# Altium PCB Copy of WoodStoveLayout2.PcbDoc (part 2 of 4)
Units mil, origin at the board's own origin, x right, y up, seen from the top; angles counter-clockwise.
Board outline 4000 x 3000 mil, 4 copper layers (Top Layer, L2, L3, Bottom Layer), stack 64.6 mil thick; 132 components, 92 nets, 551 pads, 53 vias.
Unrouted connection lines stored in the file: 211.
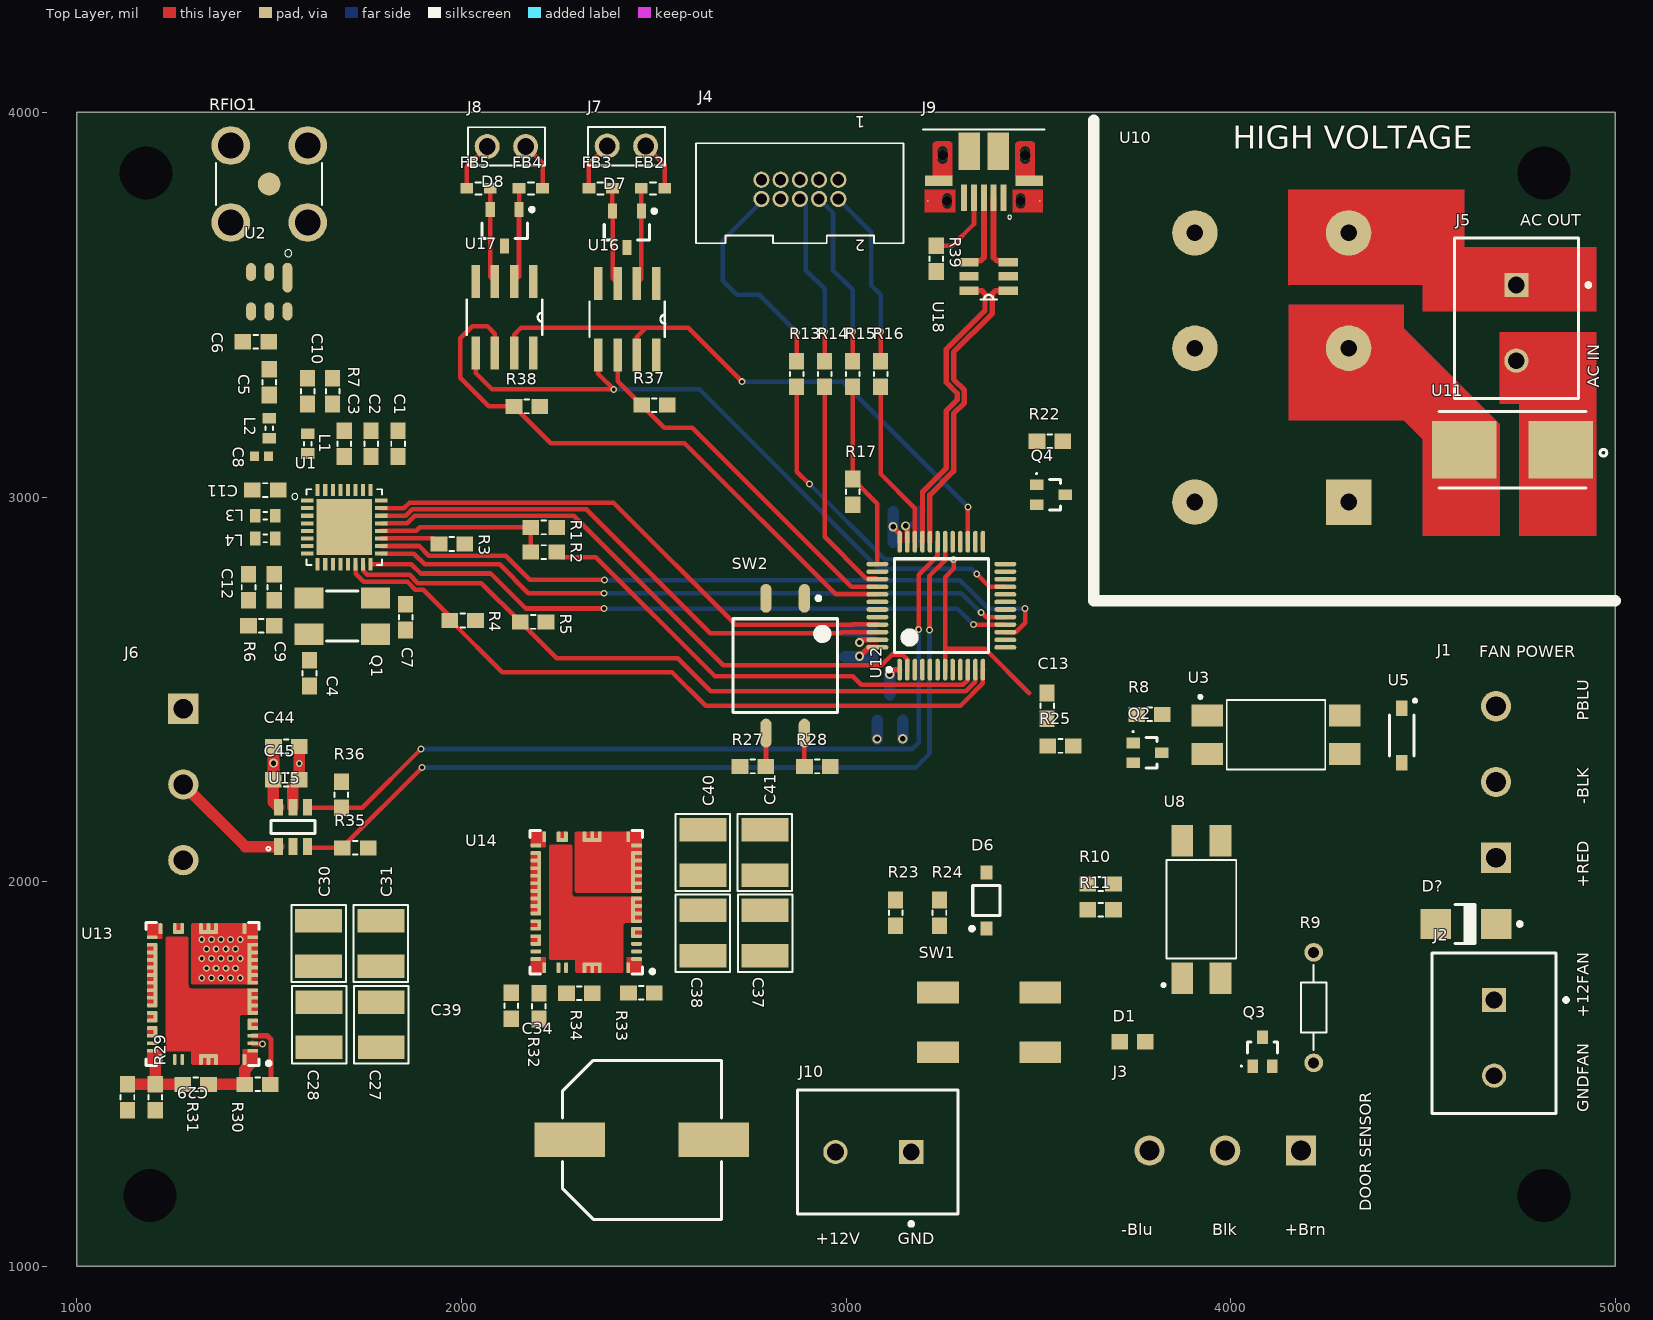
[diagram p0: Top Layer view]

## Part data (continued)
C12 C44: Capacitance=10nF, Case/Package=0603, Case Code (Metric)=1608, Dielectric=X7R, Dielectric Material=Ceramic, Insulation Resistance=10GR, Manufacturer=Murata, Manufacturer Part Number=GRM188R71H103KA01D, Max Operating Temperature=125°C, Min Operating Temperature=-55°C, Package Quantity=1, Supplier Part Number 1=490-1512-1-ND, Tolerance=10%, Voltage=50V, Case Code (Imperial)=0603, ComponentLink1Description=https://datasheet.ciiva.com/129/product-129872.pdf, ComponentLink1URL=https://datasheet.ciiva.com/129/product-129872.pdf, ComponentLink2Description=https://datasheet.ciiva.com/11786/0900766b8003061f-11786516.pdf, ComponentLink2URL=https://datasheet.ciiva.com/11786/0900766b8003061f-11786516.pdf, ComponentLink3Description=https://datasheet.ciiva.com/7937/4360-7937654.pdf, ComponentLink3URL=https://datasheet.ciiva.com/7937/4360-7937654.pdf, ComponentLink4Description=https://datasheet.ciiva.com/7937/1747461-7937655.pdf, ComponentLink4URL=https://datasheet.ciiva.com/7937/1747461-7937655.pdf, ComponentLink5Description=https://datasheet.ciiva.com/7937/1747461-7937656.pdf, ComponentLink5URL=https://datasheet.ciiva.com/7937/1747461-7937656.pdf, ComponentLink6Description=https://datasheet.ciiva.com/28534/1769893-28534235.pdf, ComponentLink6URL=https://datasheet.ciiva.com/28534/1769893-28534235.pdf, ComponentLink7Description=https://datasheet.ciiva.com/129/partnumbering-e-01-129870.pdf, ComponentLink7URL=https://datasheet.ciiva.com/129/partnumbering-e-01-129870.pdf, ComponentLink8Description=https://datasheet.ciiva.com/48428/nmgrm-data-en-48428590.pdf, ComponentLink8URL=https://datasheet.ciiva.com/48428/nmgrm-data-en-48428590.pdf, ComponentLink9Description=https://datasheet.ciiva.com/129/partnumbering-e-01-129871.pdf, ComponentLink9URL=https://datasheet.ciiva.com/129/partnumbering-e-01-129871.pdf, ComponentLink10Description=https://datasheet.ciiva.com/48428/nmgrm-data-en-48428591.pdf, ComponentLink10URL=https://datasheet.ciiva.com/48428/nmgrm-data-en-48428591.pdf, ComponentLink11Description=https://datasheet.ciiva.com/29202/451715-da-01-en-vs-kondensator-0603-29202047.pdf, ComponentLink11URL=https://datasheet.ciiva.com/29202/451715-da-01-en-vs-kondensator-0603-29202047.pdf, Depth=0.8mm, Height=0.8mm, Lead Free="Lead Free", Length=1.6mm, Material=Ceramic, Mount="Surface Mount", Number of Pins=2, Packaging="Tape and Reel", Pricing 1="1=0.1, 10=0.06, 100=0.0266, 500=0.019 (USD)", REACH SVHC=Unknown, Stock 1=0, Supplier 1=Digi-Key, Termination=SMD/SMT, Thickness=0.035inch, Voltage Rating=50V, Voltage Rating (DC)=50V, Width=0.031inch
C25 C26 C35 C36: Capacitance=10uF, Case/Package=1210, Case Code (Metric)=3225, Dielectric=X7R, Manufacturer=Murata, Manufacturer Part Number=GRM32ER71H106KA12L, Max Operating Temperature=125°C, Min Operating Temperature=-55°C, Package Quantity=1000, Supplier Part Number 1=GRM32ER71H106KA12L-ND, Tolerance=10%, Voltage=50V, Case Code (Imperial)=1210, ComponentLink1Description=https://datasheet.ciiva.com/16497/product-16497010.pdf, ComponentLink1URL=https://datasheet.ciiva.com/16497/product-16497010.pdf, ComponentLink2Description=https://datasheet.ciiva.com/6270/partnumbering-e-01-6270167.pdf, ComponentLink2URL=https://datasheet.ciiva.com/6270/partnumbering-e-01-6270167.pdf, ComponentLink3Description=https://datasheet.ciiva.com/6270/partnumbering-e-01-6270168.pdf, ComponentLink3URL=https://datasheet.ciiva.com/6270/partnumbering-e-01-6270168.pdf, ComponentLink4Description=https://datasheet.ciiva.com/6270/partnumbering-e-01-6270169.pdf, ComponentLink4URL=https://datasheet.ciiva.com/6270/partnumbering-e-01-6270169.pdf, ComponentLink5Description=https://datasheet.ciiva.com/11789/0900766b80ef921d-11789081.pdf, ComponentLink5URL=https://datasheet.ciiva.com/11789/0900766b80ef921d-11789081.pdf, ComponentLink6Description=https://datasheet.ciiva.com/3777/4286grm32er71h106ka1223-3777306.pdf, ComponentLink6URL=https://datasheet.ciiva.com/3777/4286grm32er71h106ka1223-3777306.pdf, ComponentLink7Description=https://datasheet.ciiva.com/11607/c02e-11607596.pdf, ComponentLink7URL=https://datasheet.ciiva.com/11607/c02e-11607596.pdf, ComponentLink8Description=https://datasheet.ciiva.com/46441/1754714-46441340.pdf, ComponentLink8URL=https://datasheet.ciiva.com/46441/1754714-46441340.pdf, ComponentLink9Description=https://datasheet.ciiva.com/2989/c02e-2989823.pdf, ComponentLink9URL=https://datasheet.ciiva.com/2989/c02e-2989823.pdf, Depth=2.5mm, Height=2.5mm, Lead Free="Lead Free", Length=3.2mm, Material=Ceramic, Mount="Surface Mount", Packaging="Tape and Reel", Radiation Hardening=No, REACH SVHC="No SVHC", Stock 1=0, Supplier 1=Digi-Key, Termination=SMD/SMT, Thickness=0.106inch, Voltage Rating=50V, Voltage Rating (DC)=50V, Width=2.5mm
C27 C28 C37 C38: Capacitance=4.7uF, Case/Package=1210, Case Code (Metric)=3225, Dielectric=X7R, Manufacturer=Murata, Manufacturer Part Number=GRM32ER71H475KA88L, Max Operating Temperature=125°C, Min Operating Temperature=-55°C, Package Quantity=1, Tolerance=10%, Voltage=50V, Case Code (Imperial)=1210, ComponentLink1Description=https://datasheet.ciiva.com/7937/1747494-7937780.pdf, ComponentLink1URL=https://datasheet.ciiva.com/7937/1747494-7937780.pdf, ComponentLink2Description=https://datasheet.ciiva.com/11786/0900766b806042af-11786805.pdf, ComponentLink2URL=https://datasheet.ciiva.com/11786/0900766b806042af-11786805.pdf, ComponentLink3Description=https://datasheet.ciiva.com/22703/1747494-22703399.pdf, ComponentLink3URL=https://datasheet.ciiva.com/22703/1747494-22703399.pdf, ComponentLink4Description=https://datasheet.ciiva.com/48436/grm32er71h475ka88l-eng-tds-48436715.pdf, ComponentLink4URL=https://datasheet.ciiva.com/48436/grm32er71h475ka88l-eng-tds-48436715.pdf, ComponentLink5Description=https://datasheet.ciiva.com/18101/getdatasheetpartid-55823-18101548.pdf, ComponentLink5URL=https://datasheet.ciiva.com/18101/getdatasheetpartid-55823-18101548.pdf, ComponentLink6Description=https://datasheet.ciiva.com/142/partnumbering-e-01-142157.pdf, ComponentLink6URL=https://datasheet.ciiva.com/142/partnumbering-e-01-142157.pdf, ComponentLink7Description=https://datasheet.ciiva.com/142/partnumbering-e-01-142158.pdf, ComponentLink7URL=https://datasheet.ciiva.com/142/partnumbering-e-01-142158.pdf, ComponentLink8Description=https://datasheet.ciiva.com/142/partnumbering-e-01-142159.pdf, ComponentLink8URL=https://datasheet.ciiva.com/142/partnumbering-e-01-142159.pdf, ComponentLink9Description=https://datasheet.ciiva.com/16199/product-16199503.pdf, ComponentLink9URL=https://datasheet.ciiva.com/16199/product-16199503.pdf, Depth=2.5mm, Height=2.5mm, Lead Free="Lead Free", Length=3.2mm, Mount="Surface Mount", Number of Pins=2, Packaging="Tape and Reel", Radiation Hardening=No, REACH SVHC="No SVHC", Stock 1=0, Supplier 1="Future Electronics", Supplier Part Number 1=GRM32ER71H475KA88L, Termination=SMD/SMT, Thickness=0.106inch, Voltage Rating=50V, Voltage Rating (DC)=50V, Width=0.098inch
C29: Capacitance=100pF, Case/Package=0603, Case Code (Metric)=1608, Dielectric=C0G, Dielectric Material=Ceramic, Insulation Resistance=10GR, Manufacturer=Murata, Manufacturer Part Number=GRM1885C1H101JA01D, Max Operating Temperature=125°C, Min Operating Temperature=-55°C, Package Quantity=1, Supplier Part Number 1=490-1427-2-ND, Temperature Coefficient=30ppm/°C, Tolerance=5%, Voltage=50V, Case Code (Imperial)=0603, ComponentLink1Description=https://datasheet.ciiva.com/131/product-131088.pdf, ComponentLink1URL=https://datasheet.ciiva.com/131/product-131088.pdf, ComponentLink2Description=https://datasheet.ciiva.com/3777/grm1885c1h101ja0123-3777264.pdf, ComponentLink2URL=https://datasheet.ciiva.com/3777/grm1885c1h101ja0123-3777264.pdf, ComponentLink3Description=https://datasheet.ciiva.com/131/partnumbering-e-01-131089.pdf, ComponentLink3URL=https://datasheet.ciiva.com/131/partnumbering-e-01-131089.pdf, ComponentLink4Description=https://datasheet.ciiva.com/18100/getdatasheetpartid-26823-18100641.pdf, ComponentLink4URL=https://datasheet.ciiva.com/18100/getdatasheetpartid-26823-18100641.pdf, ComponentLink5Description=https://datasheet.ciiva.com/11605/c02e-11605557.pdf, ComponentLink5URL=https://datasheet.ciiva.com/11605/c02e-11605557.pdf, ComponentLink6Description=https://datasheet.ciiva.com/28556/4360-28556551.pdf, ComponentLink6URL=https://datasheet.ciiva.com/28556/4360-28556551.pdf, ComponentLink7Description=https://datasheet.ciiva.com/7828/4360-7828889.pdf, ComponentLink7URL=https://datasheet.ciiva.com/7828/4360-7828889.pdf, ComponentLink8Description=https://datasheet.ciiva.com/7828/4360-7828890.pdf, ComponentLink8URL=https://datasheet.ciiva.com/7828/4360-7828890.pdf, ComponentLink9Description=https://datasheet.ciiva.com/7828/4360-7828891.pdf, ComponentLink9URL=https://datasheet.ciiva.com/7828/4360-7828891.pdf, ComponentLink10Description=https://datasheet.ciiva.com/14116/grmseries-tc-hitype-eng-14116828.pdf, ComponentLink10URL=https://datasheet.ciiva.com/14116/grmseries-tc-hitype-eng-14116828.pdf, ComponentLink11Description=https://datasheet.ciiva.com/16291/product-16291613.pdf, ComponentLink11URL=https://datasheet.ciiva.com/16291/product-16291613.pdf, ComponentLink12Description=https://datasheet.ciiva.com/131/partnumbering-e-01-131087.pdf, ComponentLink12URL=https://datasheet.ciiva.com/131/partnumbering-e-01-131087.pdf, ComponentLink13Description=https://datasheet.ciiva.com/14116/grmseries-tc-hitype-eng-14116815.pdf, ComponentLink13URL=https://datasheet.ciiva.com/14116/grmseries-tc-hitype-eng-14116815.pdf, ComponentLink14Description=https://datasheet.ciiva.com/29149/450134-da-01-en-vs-kondensator-0603-29149008.pdf, ComponentLink14URL=https://datasheet.ciiva.com/29149/450134-da-01-en-vs-kondensator-0603-29149008.pdf, Depth=0.8mm, Height=0.8mm, Lead Free="Lead Free", Length=1.6mm, Material=Ceramic, Mount="Surface Mount", Number of Pins=2, Packaging="Tape and Reel", Pricing 1="4000=0.01524 (USD)", Radiation Hardening=No, REACH SVHC=Unknown, Stock 1=0, Supplier 1=Digi-Key, Termination=SMD/SMT, Thickness=0.035inch, Voltage Rating=50V, Voltage Rating (DC)=50V, Weight=7.1E-05oz, Width=0.031inch
C30 C31 C32 C33 C40 C41 C42: Capacitance=22uF, Case/Package=1210, Case Code (Metric)=3225, Dielectric=X7R, Manufacturer=Murata, Manufacturer Part Number=GRM32ER71E226KE15L, Max Operating Temperature=125°C, Min Operating Temperature=-55°C, Package Quantity=1, Supplier Part Number 1=490-5313-2-ND, Tolerance=10%, Voltage=25V, Case Code (Imperial)=1210, ComponentLink1Description=https://datasheet.ciiva.com/6072/1697714-6072768.pdf, ComponentLink1URL=https://datasheet.ciiva.com/6072/1697714-6072768.pdf, ComponentLink2Description=https://datasheet.ciiva.com/16497/product-16497009.pdf, ComponentLink2URL=https://datasheet.ciiva.com/16497/product-16497009.pdf, ComponentLink3Description=https://datasheet.ciiva.com/175/partnumbering-e-01-175746.pdf, ComponentLink3URL=https://datasheet.ciiva.com/175/partnumbering-e-01-175746.pdf, ComponentLink4Description=https://datasheet.ciiva.com/175/partnumbering-e-01-175747.pdf, ComponentLink4URL=https://datasheet.ciiva.com/175/partnumbering-e-01-175747.pdf, ComponentLink5Description=https://datasheet.ciiva.com/175/partnumbering-e-01-175748.pdf, ComponentLink5URL=https://datasheet.ciiva.com/175/partnumbering-e-01-175748.pdf, ComponentLink6Description=https://datasheet.ciiva.com/3776/2741grm32er71e226ke1523-3776996.pdf, ComponentLink6URL=https://datasheet.ciiva.com/3776/2741grm32er71e226ke1523-3776996.pdf, ComponentLink7Description=https://datasheet.ciiva.com/22703/1697714-22703397.pdf, ComponentLink7URL=https://datasheet.ciiva.com/22703/1697714-22703397.pdf, ComponentLink8Description=https://datasheet.ciiva.com/11789/0900766b80ef921d-11789129.pdf, ComponentLink8URL=https://datasheet.ciiva.com/11789/0900766b80ef921d-11789129.pdf, ComponentLink9Description=https://datasheet.ciiva.com/29201/451826-da-01-de-vs-kondens-grm32-er71e-226ke15l-29201795.pdf, ComponentLink9URL=https://datasheet.ciiva.com/29201/451826-da-01-de-vs-kondens-grm32-er71e-226ke15l-29201795.pdf, Depth=2.5mm, Height=2.5mm, Lead Free="Lead Free", Length=3.2mm, Material=Ceramic, Mount="Surface Mount", Number of Pins=2, Packaging="Tape and Reel", Pricing 1="1000=0.29 (USD)", Radiation Hardening=No, REACH SVHC="No SVHC", Stock 1=0, Supplier 1=Digi-Key, Termination=SMD/SMT, Thickness=0.106inch, Voltage Rating=25V, Voltage Rating (DC)=25V, Width=0.098inch
C34: Capacitance=100uF, Case/Package=Radial, ESR (Equivalent Series Resistance)=28mR, Leakage Current=50uA, Manufacturer=Panasonic, Manufacturer Part Number=EEH-ZA1H101P, Max Operating Temperature=105°C, Min Operating Temperature=-55°C, Package Quantity=500, Ripple Current=2A, Supplier Part Number 1=P15442TR-ND, Tolerance=20%, Voltage=50V, ComponentLink1Description=https://datasheet.ciiva.com/48541/eehza-eng-tds-48541031.pdf, ComponentLink1URL=https://datasheet.ciiva.com/48541/eehza-eng-tds-48541031.pdf, ComponentLink2Description=https://datasheet.ciiva.com/18524/aba0000ce136-18524922.pdf, ComponentLink2URL=https://datasheet.ciiva.com/18524/aba0000ce136-18524922.pdf, ComponentLink3Description=https://datasheet.ciiva.com/6134/1536543-6134363.pdf, ComponentLink3URL=https://datasheet.ciiva.com/6134/1536543-6134363.pdf, ComponentLink4Description=https://datasheet.ciiva.com/7794/1536543-7794235.pdf, ComponentLink4URL=https://datasheet.ciiva.com/7794/1536543-7794235.pdf, ComponentLink5Description=https://datasheet.ciiva.com/18524/aba0000ce136-18524923.pdf, ComponentLink5URL=https://datasheet.ciiva.com/18524/aba0000ce136-18524923.pdf, ComponentLink6Description=https://datasheet.ciiva.com/30178/86aba0000ce136-30178699.pdf, ComponentLink6URL=https://datasheet.ciiva.com/30178/86aba0000ce136-30178699.pdf, ComponentLink7Description=https://datasheet.ciiva.com/14595/70256916-14595260.pdf, ComponentLink7URL=https://datasheet.ciiva.com/14595/70256916-14595260.pdf, ComponentLink8Description=https://datasheet.ciiva.com/18524/aba0000ce136-18524924.pdf, ComponentLink8URL=https://datasheet.ciiva.com/18524/aba0000ce136-18524924.pdf, ComponentLink9Description=https://datasheet.ciiva.com/28691/1536543-28691421.pdf, ComponentLink9URL=https://datasheet.ciiva.com/28691/1536543-28691421.pdf, ComponentLink10Description=https://datasheet.ciiva.com/22730/1536543-22730558.pdf, ComponentLink10URL=https://datasheet.ciiva.com/22730/1536543-22730558.pdf, ComponentLink11Description=https://datasheet.ciiva.com/10327/aba0000ce136-10327231.pdf, ComponentLink11URL=https://datasheet.ciiva.com/10327/aba0000ce136-10327231.pdf, Diameter=10mm, Height=10.2mm, Height - Seated (Max)=0.413inch, Lead Diameter=0.9mm, Lead Free="Lead Free", Lead Pitch=4.6mm, Length=10.2mm, Life (Hours)=10000Hour, Material=Polymer, Mount="Surface Mount,PCB", Packaging="Tape and Reel", Polarity=Polar, Pricing 1="500=1.20086, 1000=1.05076, 2500=1.01323, 5000=0.9757 (USD)", Radiation Hardening=No, REACH SVHC="No SVHC", Ripple Current (AC)=2A, Stock 1=21500, Supplier 1=Digi-Key, Termination=SMD/SMT, Voltage Rating=50V, Voltage Rating (DC)=50V
C39: Capacitance=150pF, Case/Package=0603, Case Code (Metric)=1608, Dielectric=C0G, Dielectric Material=Ceramic, Insulation Resistance=10GR, Manufacturer=Murata, Manufacturer Part Number=GRM1885C1H151JA01D, Max Operating Temperature=125°C, Min Operating Temperature=-55°C, Package Quantity=1, Supplier Part Number 1=490-1431-2-ND, Temperature Coefficient=30ppm/°C, Tolerance=5%, Voltage=50V, Case Code (Imperial)=0603, ComponentLink1Description=https://datasheet.ciiva.com/18100/getdatasheetpartid-31970-18100850.pdf, ComponentLink1URL=https://datasheet.ciiva.com/18100/getdatasheetpartid-31970-18100850.pdf, ComponentLink2Description=https://datasheet.ciiva.com/7828/4360-7828901.pdf, ComponentLink2URL=https://datasheet.ciiva.com/7828/4360-7828901.pdf, ComponentLink3Description=https://datasheet.ciiva.com/7828/4360-7828902.pdf, ComponentLink3URL=https://datasheet.ciiva.com/7828/4360-7828902.pdf, ComponentLink4Description=https://datasheet.ciiva.com/131/partnumbering-e-01-131975.pdf, ComponentLink4URL=https://datasheet.ciiva.com/131/partnumbering-e-01-131975.pdf, ComponentLink5Description=https://datasheet.ciiva.com/131/partnumbering-e-01-131976.pdf, ComponentLink5URL=https://datasheet.ciiva.com/131/partnumbering-e-01-131976.pdf, ComponentLink6Description=https://datasheet.ciiva.com/131/partnumbering-e-01-131977.pdf, ComponentLink6URL=https://datasheet.ciiva.com/131/partnumbering-e-01-131977.pdf, ComponentLink7Description=https://datasheet.ciiva.com/16214/product-16214654.pdf, ComponentLink7URL=https://datasheet.ciiva.com/16214/product-16214654.pdf, ComponentLink8Description=https://datasheet.ciiva.com/11787/0900766b808736db-11787103.pdf, ComponentLink8URL=https://datasheet.ciiva.com/11787/0900766b808736db-11787103.pdf, ComponentLink9Description=https://datasheet.ciiva.com/29241/450401-da-01-en-vs-kondensator-0603-29241818.pdf, ComponentLink9URL=https://datasheet.ciiva.com/29241/450401-da-01-en-vs-kondensator-0603-29241818.pdf, Depth=0.8mm, Height=0.8mm, Lead Free="Lead Free", Length=1.6mm, Material=Ceramic, Mount="Surface Mount", Number of Pins=2, Packaging="Tape and Reel", Pricing 1="4000=0.01668 (USD)", Radiation Hardening=No, REACH SVHC="No SVHC", Stock 1=0, Supplier 1=Digi-Key, Termination=SMD/SMT, Thickness=0.035inch, Voltage Rating=50V, Voltage Rating (DC)=50V, Width=0.8mm
C43: Capacitance=47uF, Case/Package=1210, Case Code (Metric)=3225, Dielectric=X5R, Manufacturer=Murata, Manufacturer Part Number=GRM32ER61C476KE15L, Max Operating Temperature=85°C, Min Operating Temperature=-55°C, Package Quantity=1, Supplier Part Number 1=GRM32ER61C476KE15L-ND, Tolerance=10%, Voltage=16V, Case Code (Imperial)=1210, ComponentLink1Description=https://datasheet.ciiva.com/5411/product-5411296.pdf, ComponentLink1URL=https://datasheet.ciiva.com/5411/product-5411296.pdf, ComponentLink2Description=https://datasheet.ciiva.com/6264/c02e-6264496.pdf, ComponentLink2URL=https://datasheet.ciiva.com/6264/c02e-6264496.pdf, ComponentLink3Description=https://datasheet.ciiva.com/16497/product-16497029.pdf, ComponentLink3URL=https://datasheet.ciiva.com/16497/product-16497029.pdf, ComponentLink4Description=https://datasheet.ciiva.com/16625/product-16625285.pdf, ComponentLink4URL=https://datasheet.ciiva.com/16625/product-16625285.pdf, ComponentLink5Description=https://datasheet.ciiva.com/6173/1747491-6173112.pdf, ComponentLink5URL=https://datasheet.ciiva.com/6173/1747491-6173112.pdf, ComponentLink6Description=https://datasheet.ciiva.com/6264/partnumbering-e-01-6264495.pdf, ComponentLink6URL=https://datasheet.ciiva.com/6264/partnumbering-e-01-6264495.pdf, ComponentLink7Description=https://datasheet.ciiva.com/29202/451184-da-01-de-vs-chip-kond-1210-47-0-uf-10pr-16-0v-x5r-29202483.pdf, ComponentLink7URL=https://datasheet.ciiva.com/29202/451184-da-01-de-vs-chip-kond-1210-47-0-uf-10pr-16-0v-x5r-29202483.pdf, ComponentLink8Description=https://datasheet.ciiva.com/29201/451871-da-01-de-vs-kondens-grm32-er61c-476ke15l-29201820.pdf, ComponentLink8URL=https://datasheet.ciiva.com/29201/451871-da-01-de-vs-kondens-grm32-er61c-476ke15l-29201820.pdf, Depth=2.5mm, Height=2.5mm, Lead Free="Lead Free", Length=3.2mm, Material=Ceramic, Mount="Surface Mount", Number of Pins=2, Packaging="Cut Tape", Radiation Hardening=No, REACH SVHC="No SVHC", Stock 1=0, Supplier 1=Digi-Key, Termination=SMD/SMT, Thickness=0.106inch, Voltage Rating=16V, Voltage Rating (DC)=16V, Width=0.098inch
D1: "LED; SMD; 0603; red; 18-54mcd; 1.6x0.8x0.55mm; 130°; 2÷2.4V; 20mA", Package="0603 Lite-On", Availability=Good, MF=Lite-On, MP=LTST-C191KRKT, Price="0.06 USD", SnapEDA_Link=https://www.snapeda.com/parts/LTST-C191KRKT/Lite-On/view-part/?ref=snap
D2 D3 D4 D5 D6: "DIODE Zener 5.1V 500mw", Breakdown Voltage=5.36V, Case/Package=SOD-123-2, Forward Voltage=900mV, Manufacturer="ON Semiconductor", Max Operating Temperature=150°C, Max Power Dissipation=500mW, Max Reverse Leakage Current=2uA, Min Operating Temperature=-55°C, Package Quantity=1, Test Current=5mA, Tolerance=5%, Voltage Rating (DC)=5.1V, Zener Current=10mA, ComponentLink1Description=https://datasheet.ciiva.com/895/mmsz2v4t1-d-895025.pdf, ComponentLink1URL=https://datasheet.ciiva.com/895/mmsz2v4t1-d-895025.pdf, ComponentLink2Description=https://datasheet.ciiva.com/895/mmsz2v4t1-d-895026.pdf, ComponentLink2URL=https://datasheet.ciiva.com/895/mmsz2v4t1-d-895026.pdf, ComponentLink3Description=https://datasheet.ciiva.com/895/mmsz2v4t1-d-895027.pdf, ComponentLink3URL=https://datasheet.ciiva.com/895/mmsz2v4t1-d-895027.pdf, ComponentLink4Description=https://datasheet.ciiva.com/15142/getdatasheetpartid-72078-15142387.pdf, ComponentLink4URL=https://datasheet.ciiva.com/15142/getdatasheetpartid-72078-15142387.pdf, ComponentLink5Description=https://datasheet.ciiva.com/8346/mmsz2v4t1-d-8346086.pdf, ComponentLink5URL=https://datasheet.ciiva.com/8346/mmsz2v4t1-d-8346086.pdf, ComponentLink6Description=https://datasheet.ciiva.com/8026/78656-8026888.pdf, ComponentLink6URL=https://datasheet.ciiva.com/8026/78656-8026888.pdf, ComponentLink7Description=https://datasheet.ciiva.com/26092/mmsz2v4t1-d-26092696.pdf, ComponentLink7URL=https://datasheet.ciiva.com/26092/mmsz2v4t1-d-26092696.pdf, ComponentLink8Description=https://datasheet.ciiva.com/16542/mmsz2v4t1-d-16542073.pdf, ComponentLink8URL=https://datasheet.ciiva.com/16542/mmsz2v4t1-d-16542073.pdf, ComponentLink9Description=https://datasheet.ciiva.com/8026/78656-8026890.pdf, ComponentLink9URL=https://datasheet.ciiva.com/8026/78656-8026890.pdf, Element Configuration=Single, Height=1.12mm, Impedance=60R, Lead Free="Lead Free", Length=2.69mm, Manufacturer Part Number=MMSZ5V1T1G, Material=Plastic, Number of Pins=2, Packaging="Tape and Reel", Peak Reverse Current=2uA, Power Dissipation=500mW, Power Rating=500mW, Radiation Hardening=No, REACH SVHC="No SVHC", Stock 1=0, Supplier 1="Future Electronics", Supplier Part Number 1=MMSZ5V1T1G, Voltage Tolerance=5%, Width=1.6mm, Working Voltage=5.1V, Zener Voltage=5.1V
D?: "Schottky Power Rectifier, 2-Pin SMA, Pb-Free, Tape and Reel", Manufacturer="On Semiconductor", Supplier Part Number 1=SS16T3GOSTR-ND, ComponentLink1Description="Manufacturer URL", ComponentLink1URL=http://www.onsemi.com/, ComponentLink2Description=Datasheet, ComponentLink2URL=http://www.onsemi.cn/pub_link/Collateral/SS16-D.PDF, ComponentLink3Description="Package Specification", ComponentLink3URL=http://www.onsemi.com/pub_link/Collateral/403D-02.PDF, Configuration=Single, DatasheetVersion="Rev. 7", IFSM Max (A)=40, Mounting Technology="Surface Mount", PackageDescription="2-Pin Small Molded Package, J-Bend Lead, Body 2.605 x 4.315 mm", PackageReference=SMA-2-403D-02, PackageVersion="Rev. G, 07/2012", Packing="Tape and Reel", PartNumber=SS16T3G, RoHS=TRUE, Supplier 1=Digi-Key, Supplier 2=Digi-Key, Supplier 3=Digi-Key, Supplier 4=Farnell, Supplier 5=Farnell, Supplier 6=Newark, Supplier 7=Newark, Supplier 8=Mouser, Supplier Part Number 2=SS16T3GOSCT-ND, Supplier Part Number 3=SS16T3GOSDKR-ND, Supplier Part Number 4=2317421, Supplier Part Number 5=1900107, Supplier Part Number 6=98H0976, Supplier Part Number 7=10N9613, Supplier Part Number 8=863-SS16T3G